# EAGLE board driver_board_v4_2tubes (EAGLE 6.5.0)
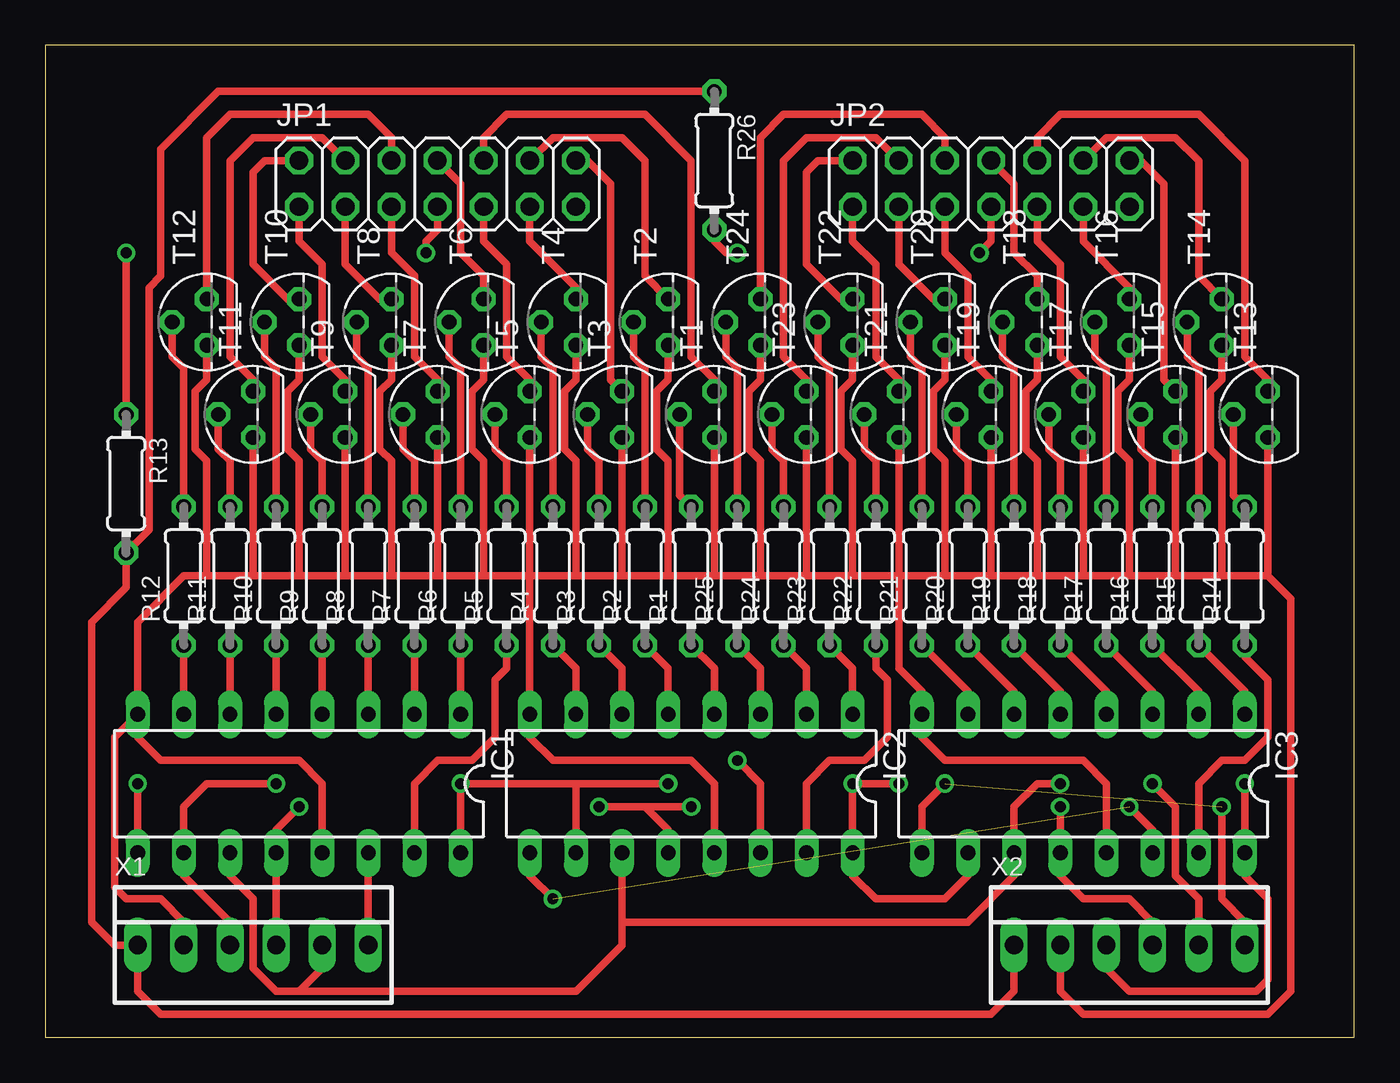
[diagram p0: board, top side]
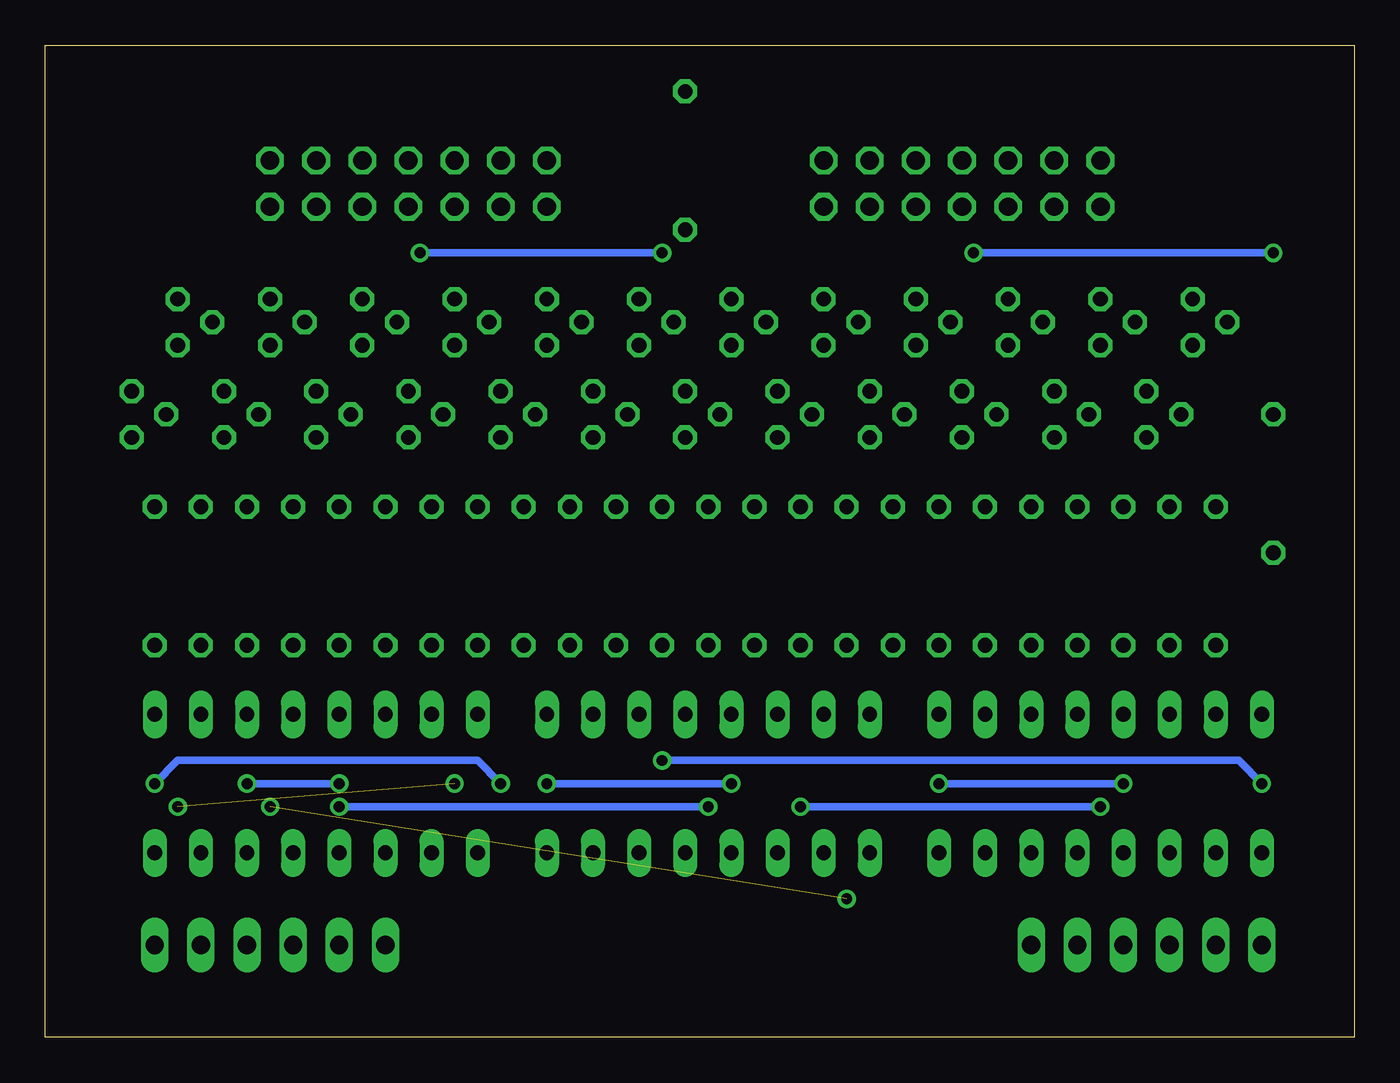
[diagram p1: board, bottom side, seen from below]

Size 72.06 x 54.6 mm. Coordinates in mm from the lower left corner, seen from the top.
Outline: 0,0 72.06,0 72.06,54.6 0,54.6 0,0
Copper layers (1*16): Top 0.035mm / dielectric 1.5mm / Bottom 0.035mm
Design rules "default": minimum track width 10mil, minimum drill 24mil, track to track 8mil, track to pad 8mil, pad to pad 8mil, via to via 8mil, smd to smd 8mil, copper to edge 40mil, drill to drill 8mil, minimum pad ring 10mil, minimum via ring 8mil, stop-mask expansion 4mil, vias tented up to drill 0mil, thermal gap 10mil

## Footprints (pad centres in the part's own frame; a part is rotated, then mirrored left to right if it is on the bottom)
DIL16 = drill 0.813 long: 1 -8.89,-3.81; 2 -6.35,-3.81; 3 -3.81,-3.81; 4 -1.27,-3.81; 5 1.27,-3.81; 6 3.81,-3.81; 7 6.35,-3.81; 8 8.89,-3.81; 9 8.89,3.81; 10 6.35,3.81; 11 3.81,3.81; 12 1.27,3.81; 13 -1.27,3.81; 14 -3.81,3.81; 15 -6.35,3.81; 16 -8.89,3.81
2X07 = drill 1.016 octagon: 1 -7.62,-1.27; 2 -7.62,1.27; 3 -5.08,-1.27; 4 -5.08,1.27; 5 -2.54,-1.27; 6 -2.54,1.27; 7 0,-1.27; 8 0,1.27; 9 2.54,-1.27; 10 2.54,1.27; 11 5.08,-1.27; 12 5.08,1.27; 13 7.62,-1.27; 14 7.62,1.27
0204/7 = drill 0.813 octagon: 1 -3.81,0; 2 3.81,0
TO92 = drill 0.813 octagon: 1 1.27,0; 2 0,1.905; 3 -1.27,0
22-23-2061 = drill 1 long: 1 -6.35,0; 2 -3.81,0; 3 -1.27,0; 4 1.27,0; 5 3.81,0; 6 6.35,0

## Placement (x,y rotation side)
IC1  74LS595N  [DIL16]  13.97,13.97 180 top
IC2  74LS595N  [DIL16]  35.56,13.97 180 top
IC3  74LS595N  [DIL16]  57.15,13.97 180 top
JP1  [2X07]  21.59,46.99 0 top
JP2  [2X07]  52.07,46.99 0 top
R1  [0204/7]  35.56,25.4 90 top
R2  [0204/7]  33.02,25.4 90 top
R3  [0204/7]  30.48,25.4 90 top
R4  [0204/7]  27.94,25.4 90 top
R5  [0204/7]  25.4,25.4 90 top
R6  [0204/7]  22.86,25.4 90 top
R7  [0204/7]  20.32,25.4 90 top
R8  [0204/7]  17.78,25.4 90 top
R9  [0204/7]  15.24,25.4 90 top
R10  [0204/7]  12.7,25.4 90 top
R11  [0204/7]  10.16,25.4 90 top
R12  [0204/7]  7.62,25.4 90 top
R13  [0204/7]  4.45,30.48 270 top
R14  [0204/7]  66.04,25.4 90 top
R15  [0204/7]  63.5,25.4 90 top
R16  [0204/7]  60.96,25.4 90 top
R17  [0204/7]  58.42,25.4 90 top
R18  [0204/7]  55.88,25.4 90 top
R19  [0204/7]  53.34,25.4 90 top
R20  [0204/7]  50.8,25.4 90 top
R21  [0204/7]  48.26,25.4 90 top
R22  [0204/7]  45.72,25.4 90 top
R23  [0204/7]  43.18,25.4 90 top
R24  [0204/7]  40.64,25.4 90 top
R25  [0204/7]  38.1,25.4 90 top
R26  [0204/7]  36.83,48.26 270 top
T1  2N3565  [TO92]  36.83,34.29 90 top
T2  2N3565  [TO92]  34.29,39.37 90 top
T3  2N3565  [TO92]  31.75,34.29 90 top
T4  2N3565  [TO92]  29.21,39.37 90 top
T5  2N3565  [TO92]  26.67,34.29 90 top
T6  2N3565  [TO92]  24.13,39.37 90 top
T7  2N3565  [TO92]  21.59,34.29 90 top
T8  2N3565  [TO92]  19.05,39.37 90 top
T9  2N3565  [TO92]  16.51,34.29 90 top
T10  2N3565  [TO92]  13.97,39.37 90 top
T11  2N3565  [TO92]  11.43,34.29 90 top
T12  2N3565  [TO92]  8.89,39.37 90 top
T13  2N3565  [TO92]  67.31,34.29 90 top
T14  2N3565  [TO92]  64.77,39.37 90 top
T15  2N3565  [TO92]  62.23,34.29 90 top
T16  2N3565  [TO92]  59.69,39.37 90 top
T17  2N3565  [TO92]  57.15,34.29 90 top
T18  2N3565  [TO92]  54.61,39.37 90 top
T19  2N3565  [TO92]  52.07,34.29 90 top
T20  2N3565  [TO92]  49.53,39.37 90 top
T21  2N3565  [TO92]  46.99,34.29 90 top
T22  2N3565  [TO92]  44.45,39.37 90 top
T23  2N3565  [TO92]  41.91,34.29 90 top
T24  2N3565  [TO92]  39.37,39.37 90 top
X1  [22-23-2061]  11.43,5.08 0 top
X2  [22-23-2061]  59.69,5.08 0 top

## Library data of the parts
IC1-IC3 = 74xx-us
JP1 JP2 = pinhead
R1-R26 = resistor
T1-T24 = transistor
X1 X2 = con-molex; MF: MOLEX; MPN: 22-23-2061; OC_FARNELL: 1462922; OC_NEWARK: 27C1933

## Nets
GND: IC1.8 IC1.13 IC2.8 IC2.13 IC3.8 IC3.13 T1.3 T2.3 T3.3 T4.3 T5.3 T6.3 T7.3 T8.3 T9.3 T10.3 T11.3 T12.3 T13.3 T14.3 T15.3 T16.3 T17.3 T18.3 T19.3 T20.3 T21.3 T22.3 T23.3 T24.3 X1.2 X2.2
N$1: R12.2 T12.2
N$2: R11.2 T11.2
N$3: R10.2 T10.2
N$4: R9.2 T9.2
N$5: R8.2 T8.2
N$6: R7.2 T7.2
N$7: R6.2 T6.2
N$8: R5.2 T5.2
N$9: R4.2 T4.2
N$10: R3.2 T3.2
N$11: R2.2 T2.2
N$12: R1.2 T1.2
N$13: JP1.6 T12.1
N$14: JP1.4 T11.1
N$15: JP1.2 T10.1
N$16: JP1.1 T9.1
N$17: JP1.3 T8.1
N$18: JP1.5 T7.1
N$19: JP1.10 T1.1
N$20: JP1.12 T2.1
N$21: JP1.14 T3.1
N$22: JP1.8 T6.1
N$23: JP1.9 T5.1
N$24: JP1.11 T4.1
N$25: JP2.7 R26.2
N$26: R25.2 T24.2
N$27: R24.2 T23.2
N$28: R23.2 T22.2
N$29: R22.2 T21.2
N$30: R21.2 T20.2
N$31: R20.2 T19.2
N$32: R19.2 T18.2
N$33: R18.2 T17.2
N$34: R17.2 T16.2
N$35: R16.2 T15.2
N$36: R15.2 T14.2
N$37: R14.2 T13.2
N$38: JP2.6 T24.1
N$39: JP2.4 T23.1
N$40: JP2.2 T22.1
N$41: JP2.1 T21.1
N$42: JP2.3 T20.1
N$43: JP2.5 T19.1
N$44: JP2.10 T13.1
N$45: JP2.12 T14.1
N$46: JP2.14 T15.1
N$47: JP2.8 T18.1
N$48: JP2.9 T17.1
N$49: JP2.11 T16.1
N$50: R13.2 R26.1 X1.1 X2.1
N$51: JP1.7 R13.1
N$52: IC1.9 IC2.14
N$53: IC2.9 IC3.14
N$54: IC3.9 X2.6
N$55: IC1.14 X1.6
N$58: IC1.11 IC2.11 IC3.11 X1.5 X2.5
N$59: IC1.12 IC2.12 IC3.12 X1.4 X2.4
N$75: IC1.7 R12.1
N$76: IC1.6 R11.1
N$77: IC1.5 R10.1
N$78: IC1.4 R9.1
N$79: IC1.3 R8.1
N$80: IC1.2 R7.1
N$81: IC1.1 R6.1
N$82: IC1.15 R5.1
N$84: IC2.7 R4.1
N$85: IC2.6 R3.1
N$86: IC2.5 R2.1
N$87: IC2.4 R1.1
N$88: IC2.3 R25.1
N$89: IC2.2 R24.1
N$90: IC2.1 R23.1
N$91: IC2.15 R22.1
N$92: IC3.7 R21.1
N$93: IC3.6 R20.1
N$94: IC3.5 R19.1
N$95: IC3.4 R18.1
N$96: IC3.3 R17.1
N$97: IC3.2 R16.1
N$98: IC3.1 R15.1
N$99: IC3.15 R14.1
VCC: IC1.10 IC1.16 IC2.10 IC2.16 IC3.10 IC3.16 X1.3 X2.3

## Tracks (layer width: path | path; a pad name or v marks a point on that pad's centre or on a via)
GND
  Top 0.406: T11.3 11.43,25.4 | 11.43,25.4 13.97,25.4 | 13.97,25.4 16.51,25.4 | 16.51,25.4 T9.3 | T10.3 13.97,36.2 13.34,35.56 13.34,32.38 13.97,31.75 13.97,25.4 | T12.3 8.89,36.2 8.26,35.56 8.26,32.38 8.89,31.75 8.89,25.4 | 8.89,25.4 11.43,25.4 | T8.3 19.05,36.2 18.41,35.56 18.41,32.38 19.05,31.75 19.05,25.4 | 19.05,25.4 21.59,25.4 | 21.59,25.4 T7.3 | T5.3 26.67,25.4 | 26.67,25.4 24.13,25.4 | 24.13,25.4 21.59,25.4 | T3.3 31.75,25.4 | 31.75,25.4 29.21,25.4 | 29.21,25.4 26.67,25.4 | 19.05,25.4 16.51,25.4 | 36.83,25.4 34.29,25.4 | 34.29,25.4 31.75,25.4 | T2.3 34.29,36.2 33.66,35.56 33.66,32.38 34.29,31.75 34.29,25.4 | T4.3 29.21,36.2 28.57,35.56 28.57,32.38 29.21,31.75 29.21,25.4 | T6.3 24.13,36.2 23.5,35.56 23.5,32.38 24.13,31.75 24.13,25.4 | T23.3 41.91,25.4 | 41.91,25.4 44.45,25.4 | 44.45,25.4 46.99,25.4 | 46.99,25.4 T21.3 | T22.3 44.45,36.2 43.81,35.56 43.81,32.38 44.45,31.75 44.45,25.4 | T24.3 39.37,36.2 38.73,35.56 38.73,32.38 39.37,31.75 39.37,25.4 | 39.37,25.4 41.91,25.4 | T20.3 49.53,36.2 48.9,35.56 48.9,32.38 49.53,31.75 49.53,25.4 | 49.53,25.4 52.07,25.4 | 52.07,25.4 T19.3 | T17.3 57.15,25.4 | 57.15,25.4 54.61,25.4 | 54.61,25.4 52.07,25.4 | T15.3 62.23,25.4 | 62.23,25.4 59.69,25.4 | 59.69,25.4 57.15,25.4 | 49.53,25.4 46.99,25.4 | T13.3 67.31,25.4 | 67.31,25.4 64.77,25.4 | 64.77,25.4 62.23,25.4 | T14.3 64.77,36.2 64.14,35.56 64.14,32.38 64.77,31.75 64.77,25.4 | T16.3 59.69,36.2 59.05,35.56 59.05,32.38 59.69,31.75 59.69,25.4 | T18.3 54.61,36.2 53.98,35.56 53.98,32.38 54.61,31.75 54.61,25.4 | IC1.8 5.08,22.86 7.62,25.4 8.89,25.4 | 26.67,25.4 IC2.8 26.67,16.51 27.94,15.24 35.56,15.24 36.83,13.97 IC2.13 | 46.99,25.4 46.99,20.32 48.26,19.05 IC3.8 48.26,16.51 49.53,15.24 57.15,15.24 58.42,13.97 IC3.13
  Top 0.406: T1.3 36.83,25.4 | 36.83,25.4 39.37,25.4 | IC1.8 3.81,16.51 3.81,8.26 4.45,7.62 6.35,7.62 7.62,6.35 X1.2 | X2.2 55.88,2.54 57.15,1.27 67.31,1.27 68.58,2.54 68.58,24.13 67.31,25.4 | IC1.13 15.24,13.97 13.97,15.24 6.35,15.24 5.08,16.51 IC1.8
N$1
  Top 0.406: T12.2 6.99,37.47 7.62,36.83 R12.2
N$2
  Top 0.406: T11.2 9.53,32.38 10.16,31.75 R11.2
N$3
  Top 0.406: T10.2 12.06,37.47 12.7,36.83 R10.2
N$4
  Top 0.406: T9.2 14.61,32.38 15.24,31.75 R9.2
N$5
  Top 0.406: R8.2 17.78,36.83 17.14,37.47 T8.2
N$6
  Top 0.406: R7.2 20.32,31.75 19.68,32.38 T7.2
N$7
  Top 0.406: R6.2 22.86,36.83 22.23,37.47 T6.2
N$8
  Top 0.406: R5.2 25.4,31.75 24.77,32.38 T5.2
N$9
  Top 0.406: R4.2 27.94,36.83 27.3,37.47 T4.2
N$10
  Top 0.406: R3.2 30.48,31.75 29.84,32.38 T3.2
N$11
  Top 0.406: R2.2 33.02,36.83 32.38,37.47 T2.2
N$12
  Top 0.406: R1.2 34.92,29.84 T1.2
N$13
  Top 0.406: T12.1 8.89,49.53 10.16,50.8 17.78,50.8 19.05,49.53 JP1.6
N$14
  Top 0.406: JP1.4 15.24,49.53 11.43,49.53 10.16,48.26 10.16,37.47 11.43,36.2 T11.1
N$15
  Top 0.406: JP1.2 12.06,48.26 11.43,47.62 11.43,42.55 13.34,40.64 T10.1
N$16
  Top 0.406: JP1.1 13.97,43.81 15.24,42.55 15.24,37.47 16.51,36.2 T9.1
N$17
  Top 0.406: JP1.3 16.51,42.55 18.41,40.64 T8.1
N$18
  Top 0.406: JP1.5 19.05,43.18 20.32,41.91 20.32,37.47 21.59,36.2 T7.1
N$19
  Top 0.406: JP1.10 24.13,49.53 25.4,50.8 33.02,50.8 35.56,48.26 35.56,37.47 36.83,36.2 T1.1
N$20
  Top 0.406: JP1.12 27.94,49.53 31.75,49.53 33.02,48.26 33.02,41.91 T2.1
N$21
  Top 0.406: JP1.14 29.84,48.26 31.11,46.99 31.11,36.2 T3.1
N$22
  Top 0.406: T6.1 24.13,41.91 22.86,43.18 22.86,46.99 JP1.8
N$23
  Top 0.406: JP1.9 24.13,43.81 25.4,42.55 25.4,37.47 26.67,36.2 T5.1
N$24
  Top 0.406: JP1.11 26.67,43.81 29.21,41.27 T4.1
N$25  (via drill 0.6)
  Top 0.406: JP2.7 52.07,43.81 v51.44,43.18 | R26.2 36.83,43.81 37.47,43.18 v38.1,43.18
  Bottom 0.406: v51.44,43.18 v38.1,43.18
N$26
  Top 0.406: T24.2 37.47,37.47 38.1,36.83 R25.2
N$27
  Top 0.406: T23.2 40.01,32.38 40.64,31.75 R24.2
N$28
  Top 0.406: T22.2 42.55,37.47 43.18,36.83 R23.2
N$29
  Top 0.406: T21.2 45.09,32.38 45.72,31.75 R22.2
N$30
  Top 0.406: R21.2 48.26,36.83 47.62,37.47 T20.2
N$31
  Top 0.406: R20.2 50.8,31.75 50.16,32.38 T19.2
N$32
  Top 0.406: R19.2 53.34,36.83 52.7,37.47 T18.2
N$33
  Top 0.406: R18.2 55.88,31.75 55.24,32.38 T17.2
N$34
  Top 0.406: R17.2 58.42,36.83 57.78,37.47 T16.2
N$35
  Top 0.406: R16.2 60.96,31.75 60.33,32.38 T15.2
N$36
  Top 0.406: R15.2 63.5,36.83 62.87,37.47 T14.2
N$37
  Top 0.406: R14.2 65.41,29.84 T13.2
N$38
  Top 0.406: T24.1 39.37,49.53 40.64,50.8 48.26,50.8 49.53,49.53 JP2.6
N$39
  Top 0.406: JP2.4 45.72,49.53 41.91,49.53 40.64,48.26 40.64,37.47 41.91,36.2 T23.1
N$40
  Top 0.406: JP2.2 42.55,48.26 41.91,47.62 41.91,42.55 43.81,40.64 T22.1
N$41
  Top 0.406: JP2.1 44.45,43.81 45.72,42.55 45.72,37.47 46.99,36.2 T21.1
N$42
  Top 0.406: JP2.3 46.99,42.55 48.9,40.64 T20.1
N$43
  Top 0.406: JP2.5 49.53,43.18 50.8,41.91 50.8,37.47 52.07,36.2 T19.1
N$44
  Top 0.406: JP2.10 54.61,49.53 55.88,50.8 63.5,50.8 66.04,48.26 66.04,37.47 67.31,36.2 T13.1
N$45
  Top 0.406: JP2.12 58.42,49.53 62.23,49.53 63.5,48.26 63.5,41.91 T14.1
N$46
  Top 0.406: JP2.14 60.33,48.26 61.59,46.99 61.59,36.2 T15.1
N$47
  Top 0.406: T18.1 54.61,41.91 53.34,43.18 53.34,46.99 JP2.8
N$48
  Top 0.406: JP2.9 54.61,43.81 55.88,42.55 55.88,37.47 57.15,36.2 T17.1
N$49
  Top 0.406: JP2.11 57.15,43.81 59.69,41.27 T16.1
N$50
  Top 0.406: X2.1 53.34,2.54 52.07,1.27 6.35,1.27 5.08,2.54 X1.1 3.81,5.08 2.54,6.35 2.54,22.86 4.45,24.77 R13.2 5.71,27.94 5.71,41.27 6.35,41.91 6.35,48.9 9.53,52.07 R26.1
N$51  (via drill 0.6)
  Top 0.406: JP1.7 21.59,44.45 20.95,43.81 v20.95,43.18 | R13.1 v4.45,43.18
  Bottom 0.406: v4.45,43.18 v20.95,43.18
N$52  (via drill 0.6)
  Top 0.406: IC1.9 v5.08,13.97 | v38.1,15.24 39.37,13.97 IC2.14
  Bottom 0.406: v5.08,13.97 6.35,15.24 v38.1,15.24
N$53  (via drill 0.6)  (1 unrouted)
  Top 0.406: IC2.9 26.67,8.89 v27.94,7.62 | IC3.14 60.96,11.43 v59.69,12.7
N$54  (via drill 0.6)  (1 unrouted)
  Top 0.406: IC3.9 48.26,12.7 v49.53,13.97 | X2.6 66.04,6.35 64.77,7.62 v64.77,12.7
N$55
  Top 0.406: X1.6 IC1.14
N$58  (via drill 0.6)
  Top 0.406: IC1.11 10.16,8.89 11.43,7.62 11.43,3.81 12.7,2.54 13.97,2.54 | 13.97,2.54 15.24,3.81 X1.5 | 31.75,6.35 31.75,5.08 29.21,2.54 13.97,2.54 | IC2.11 31.75,6.35 | 31.75,6.35 50.8,6.35 53.34,8.89 IC3.11 53.34,12.7 54.61,13.97 v55.88,13.97 | X2.5 63.5,7.62 62.23,8.89 62.23,12.7 v60.96,13.97
  Bottom 0.406: v55.88,13.97 v60.96,13.97
N$59  (via drill 0.6)
  Top 0.406: X1.4 IC1.12 12.7,11.43 v13.97,12.7 | IC2.12 34.29,11.43 33.02,12.7 v30.48,12.7 v35.56,12.7 | v55.88,12.7 IC3.12 55.88,8.89 57.15,7.62 59.69,7.62 60.96,6.35 X2.4
  Bottom 0.406: v30.48,12.7 v13.97,12.7 | v35.56,12.7 v55.88,12.7
N$75
  Top 0.406: R12.1 IC1.7
N$76
  Top 0.406: R11.1 IC1.6
N$77
  Top 0.406: R10.1 IC1.5
N$78
  Top 0.406: R9.1 IC1.4
N$79
  Top 0.406: R8.1 IC1.3
N$80
  Top 0.406: R7.1 IC1.2
N$81
  Top 0.406: R6.1 IC1.1
N$82
  Top 0.406: R5.1 25.4,20.32 24.77,19.68 24.77,16.51 23.5,15.24 21.59,15.24 20.32,13.97 IC1.15 20.32,11.43
N$84
  Top 0.406: R4.1 29.21,20.32 IC2.7
N$85
  Top 0.406: R3.1 31.75,20.32 IC2.6
N$86
  Top 0.406: R2.1 34.29,20.32 IC2.5
N$87
  Top 0.406: R1.1 36.83,20.32 IC2.4
N$88
  Top 0.406: R25.1 39.37,20.32 IC2.3
N$89
  Top 0.406: R24.1 41.91,20.32 IC2.2
N$90
  Top 0.406: R23.1 44.45,20.32 IC2.1
N$91
  Top 0.406: R22.1 45.72,20.32 46.35,19.68 46.35,16.51 45.09,15.24 43.18,15.24 41.91,13.97 IC2.15
N$92
  Top 0.406: R21.1 50.8,19.05 IC3.7
N$93
  Top 0.406: R20.1 53.34,19.05 IC3.6
N$94
  Top 0.406: R19.1 55.88,19.05 IC3.5
N$95
  Top 0.406: R18.1 58.42,19.05 IC3.4
N$96
  Top 0.406: R17.1 60.96,19.05 IC3.3
N$97
  Top 0.406: R16.1 63.5,19.05 IC3.2
N$98
  Top 0.406: R15.1 66.04,19.05 IC3.1
N$99
  Top 0.406: R14.1 66.04,20.95 67.31,19.68 67.31,16.51 66.04,15.24 64.77,15.24 63.5,13.97 IC3.15
VCC  (via drill 0.6)
  Top 0.406: X2.3 58.42,3.81 59.69,2.54 66.67,2.54 67.31,3.17 67.31,7.62 66.04,8.89 IC3.16 v66.04,13.97 | X1.3 10.16,6.35 7.62,8.89 IC1.10 7.62,12.7 8.89,13.97 v12.7,13.97 | IC1.16 v22.86,13.97 | v22.86,13.97 27.94,13.97 | 29.21,13.97 IC2.10 | v22.86,13.97 29.21,13.97 | 29.21,13.97 v34.29,13.97 | IC3.10 50.8,8.89 49.53,7.62 45.72,7.62 44.45,8.89 IC2.16 v44.45,13.97 v46.99,13.97
  Bottom 0.406: v12.7,13.97 v22.86,13.97 | v34.29,13.97 v44.45,13.97 | v66.04,13.97 64.77,15.24 48.26,15.24 v46.99,13.97